# Altium PCB Mainboard PCB.pcbdoc (part 2 of 2)
Units mil, origin at the board's own origin, x right, y up, seen from the top; angles counter-clockwise.
Board outline 6050 x 5225 mil, 2 copper layers (Top Layer, Bottom Layer); 153 components, 224 nets, 656 pads, 330 vias.
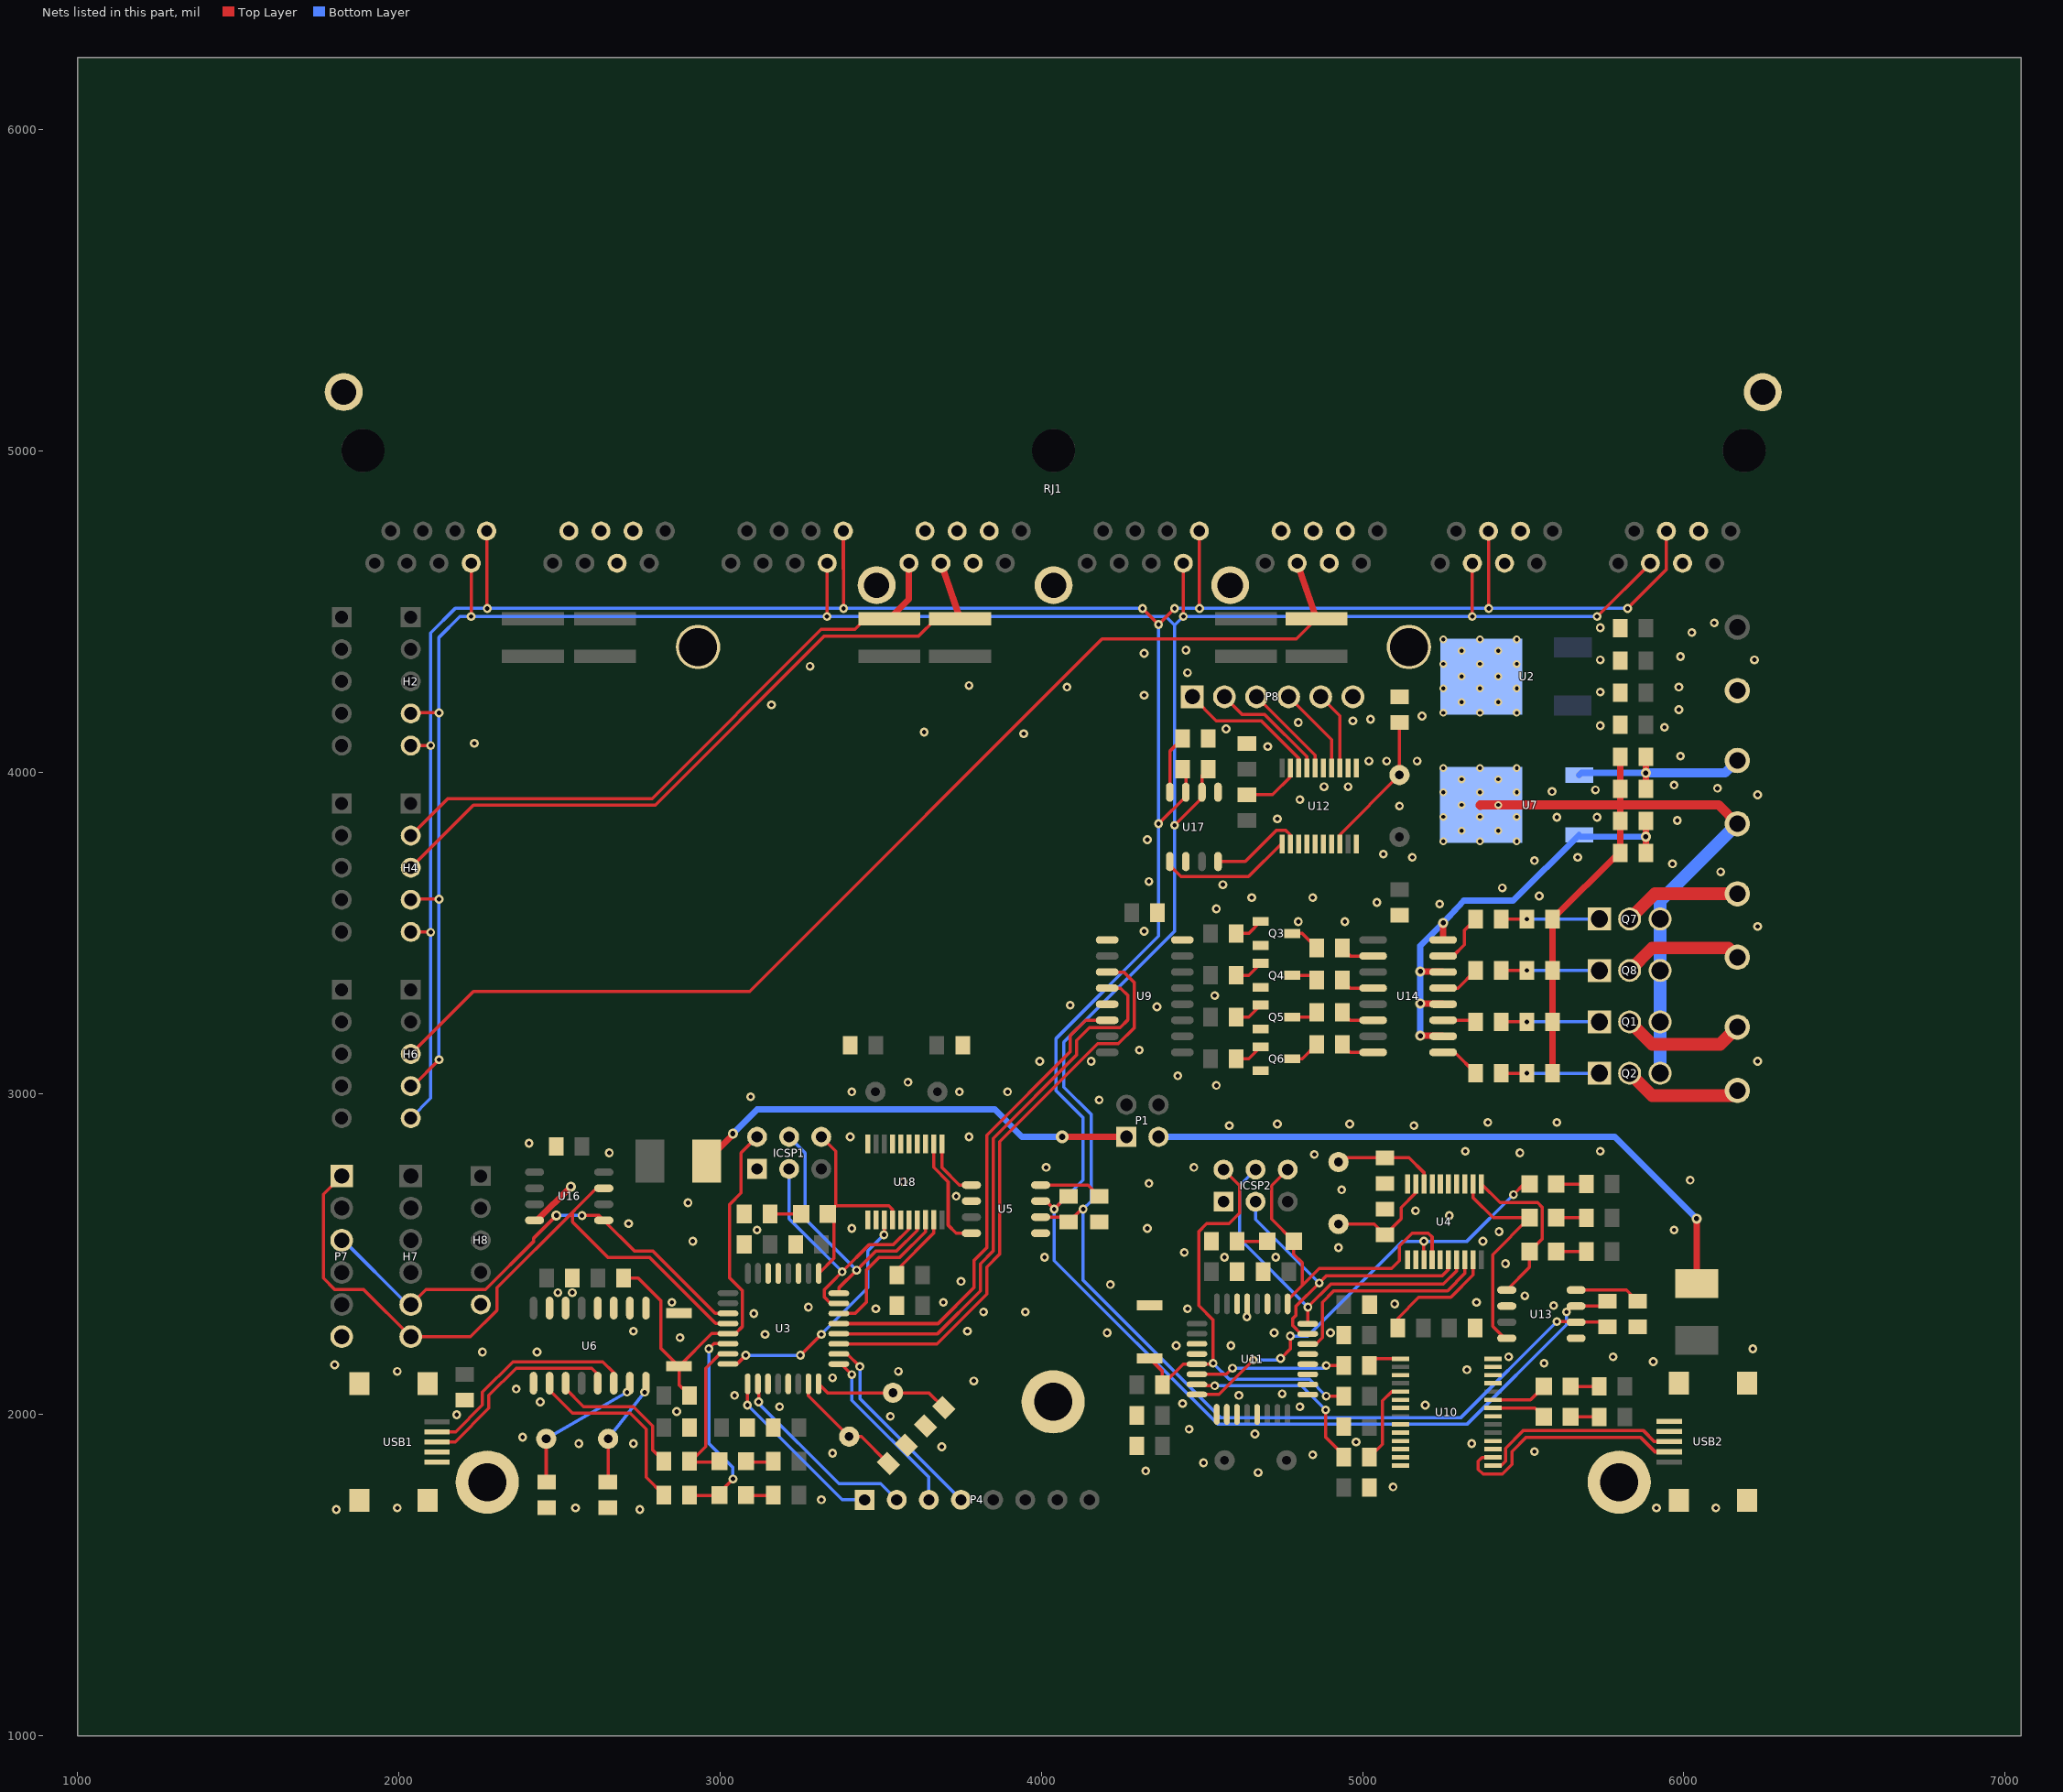
[diagram p2: the nets of this part, all layers, seen from the top]

## Via types
v1: diameter 27.56, hole 13.78, Top Layer to Bottom Layer, 259 vias
v2: diameter 24.41, hole 12, Top Layer to Bottom Layer, 36 vias
v3: diameter 31.5, hole 15.75, Top Layer to Bottom Layer, 24 vias
v4: diameter 39.37, hole 19.69, Top Layer to Bottom Layer, 5 vias
v5: diameter 35.43, hole 35.43, Top Layer to Bottom Layer, 4 vias
v6: diameter 47.24, hole 23.62, Top Layer to Bottom Layer, 2 vias

## Nets (pads, with @x,y where several pads share a name; then routed paths per layer and width w, separated by ;. In a path a pad name is that pad's centre, name@x,y a point inside that pad or via, vN(x,y) a via of type N, cw(c..) or ccw(c..) an arc to the next point about the centre after c; other vN are vias at no path point) (continued)
C36_1: C36.1 U12.8 X6.1 | length 455.3
  Top Layer w10: U12.8@4928.97,3776.86 4928.97,3805.42 X6.1@5115,3991.46 ; X6.1@5114.99,3991.41 C36.1@5115,4155
CANH: H2.5 H4.5 H6.5 R6.1 R19.1 R40.1 RJ1.8 RJ1.24 RJ1.40 RJ1.52 RJ1.60 U5.7 U13.7 U17.7 | length 11339.4
  Top Layer w10: H4.5@2036.99,3503.01 2097.81,3503.01 v1(2098.99,3501.82) ; H2.5@2036.99,4083.01 v1(2098.99,4083.45) ; RJ1.8@2273.3,4750.92 2273.29,4511.71 v1(2275.01,4509.99) ; RJ1.24@3383.59,4750.9 v1(3384.12,4509.99) ; U5.7@3997.87,2665 4015.01,2664.99 v1(4040.01,2639.99) 4079.99,2679.99 R6.1@4085,2680 ; v1(4315.01,4509.99) v1(4365.01,4459.99) v1(4415.01,4509.99) ; v1(4364.99,3840.01) 4449.99,3925.01 U17.7@4450,3937.87 ; R40.1@4440,4010 4450.01,3999.99 U17.7@4450,3937.87 ; RJ1.40@4492.19,4750.9 v1(4492.34,4509.99) ; RJ1.52@5391.99,4750.7 5391.99,4511.05 v1(5393.06,4509.99) ; v1(5635.01,2319.99) 5652.99,2338.01 U13.7@5664.87,2338.01 ; U13.7@5664.87,2338.01 5746.99,2338 R19.1@5761.99,2353.01 ; v1(5825.01,4509.99) 5946.3,4631.29 RJ1.60@5946.3,4750.7
  Bottom Layer w10: H6.5@2036.99,2923.01 2098.99,2985.01 v1(2098.99,3501.82) v1(2098.99,4083.45) 2098.99,4434.01 2174.98,4509.99 v1(2275.01,4509.99) v1(3384.12,4509.99) v1(4315.01,4509.99) ; v1(4365.01,4459.99) 4365.01,3890.01 4364.99,3490.01 4044.99,3170.01 4044.99,3010.01 4129.99,2925.01 4129.99,2729.99 v1(4040.01,2639.99) 4040,2480 4550,1970 5325,1970 5635,2280 v1(5635.01,2319.99) ; v1(4415.01,4509.99) v1(4492.34,4509.99) v1(5393.06,4509.99) v1(5825.01,4509.99)
CANL: H2.4 H4.4 H6.4 R6.2 R19.2 R40.2 RJ1.7 RJ1.23 RJ1.39 RJ1.51 RJ1.59 U5.6 U13.6 U17.6 | length 10716.2
  Top Layer w10: H6.4@2036.99,3023.01 2043.02,3023.01 v1(2125.01,3104.99) v1@2120,3110 ; H4.4@2036.99,3603.01 2038.98,3604.99 v1(2125.01,3604.99) ; H2.4@2036.99,4183.01 2038.98,4184.99 v1(2125.01,4184.99) ; RJ1.7@2224.89,4650.9 2224.89,4485.1 v1(2225.01,4484.99) ; v1(3332.62,4484.99) RJ1.23@3333.59,4650.9 ; U5.6@3997.87,2615 4070.01,2614.99 R6.2@4085,2600 4124.99,2640.01 v1(4130.01,2639.99) ; v1(4415.01,3834.99) 4500.01,3920.01 U17.6@4500,3937.87 4500.01,3990 R40.2@4520,4010 ; RJ1.39@4442.19,4650.9 v1(4442.34,4484.99) ; v1(5341.56,4484.99) RJ1.51@5341.99,4650.7 ; v1(5605.01,2289.99) 5662.87,2289.99 U13.6@5664.87,2288.01 5747,2288 R19.2@5761.99,2273.01 ; v1(5730.01,4484.99) 5730.59,4484.99 RJ1.59@5896.3,4650.7
  Bottom Layer w10: v1(2125.01,3104.99) v1(2125.01,3604.99) v1(2125.01,4184.99) 2125.01,4419.99 2190.01,4484.99 v1(2225.01,4484.99) v1(3332.62,4484.99) 4387.67,4484.99 ; 4387.69,4485.01 4414.99,4457.7 ; v1(5341.56,4484.99) v1(4442.34,4484.99) 4415,4457.66 4415,3890 4414.99,3505.01 4069.99,3160.01 4069.99,3020.01 4154.99,2935.01 4154.99,2665.01 v1(4130.01,2639.99) 4129.99,2418.85 4558.85,1990 5305,1990 v1(5605.01,2289.99) ; v1(5341.56,4484.99) v1(5730.01,4484.99)
CS1: U3.14 U18.18 | length 471.3
  Top Layer w10: U3.14@3369.49,2315.01 3419.99,2315.01 3454.99,2350.01 3454.99,2450.01 3494.99,2490.01 3559.99,2490.01 3638.99,2569.01 U18.18@3638.97,2607.05
CS2: U4.18 U11.14 | length 687.1
  Top Layer w10: U11.14@4829.49,2220.01 4854.99,2220.01 4874.99,2240.01 4874.99,2350.01 4909.99,2385.01 5264.99,2385.01 5318.99,2441.01 U4.18@5318.97,2482.05
CS3: P8.1 U12.18 | length 441.2
  Top Layer w10: P8.1@4470,4235 4544.99,4160 4685,4160 4801.03,4043.96 U12.18@4801.03,4012.95
D3/1: P4.1 U3.1 | length 553.7
  Top Layer w10: v1(3085.01,2029.99) 3085.01,2094.91 U3.1@3086.09,2096.01
  Bottom Layer w10: v1(3085.01,2029.99) 3380.01,1734.99 P4.1@3450,1735
D3/2: U11.1
D4/1: P4.2 U3.2 | length 616.3
  Top Layer w10: U3.2@3117.59,2096.01 3120.01,2093.6 v1(3120.01,2039.99)
  Bottom Layer w10: v1(3120.01,2039.99) 3119.99,2035.01 3369.99,1785.01 3499.99,1785.01 P4.2@3550,1735
D4/2: U11.2
D5/1: P4.3 U3.9 | length 543.4
  Top Layer w10: U3.9@3369.49,2157.61 3377.39,2157.61 v1(3410.01,2124.99)
  Bottom Layer w10: v1(3410.01,2124.99) 3409.99,2045.01 3649.99,1805.01 P4.3@3650,1735
D5/2: U11.9
D6/1: P4.4 U3.10 | length 627.2
  Top Layer w10: U3.10@3369.49,2189.11 3395.89,2189.11 v1(3435.01,2149.99)
  Bottom Layer w10: v1(3435.01,2149.99) 3434.99,2050.01 P4.4@3750,1735
D6/2: U11.10
D7/2: U11.11
D8/2: U11.12
D9/2: U11.13
DS: U3.13 U9.14 | length 1510.8
  Top Layer w10: U3.13@3369.49,2283.51 3678.49,2283.51 3789.99,2395.01 3789.99,2480.01 3829.99,2520.01 3829.99,2870.01 4089.99,3130.01 4089.99,3180.01 4137.99,3228.01 U9.14@4204.99,3228.01
E3: H4.2 R43.1 RJ1.25 | length 1967.7
  Top Layer w10: H4.2@2036.99,3803.01 2151.99,3918.01 2787.99,3918.01 3314.99,4445.01 3419.99,4445.01 3452.99,4478.01 R43.1@3526.99,4478.01
  Top Layer w19.68: R43.1@3526.99,4478.01 3587.89,4538.9 RJ1.25@3587.89,4650.9
E4: H4.3 R44.1 RJ1.27 | length 2213.7
  Top Layer w10: H4.3@2036.99,3703.01 2231.99,3898.01 2797.99,3898.01 3322.99,4423.01 3616.99,4423.01 3671.99,4478.01 R44.1@3746.99,4478.01
  Top Layer w19.68: RJ1.27@3687.89,4650.9 R44.1@3746.99,4478.01
E6: H6.3 R46.1 RJ1.43 | length 3564.4
  Top Layer w10: H6.3@2036.99,3123.01 2231.99,3318.01 3091.99,3318.01 4188.99,4415.01 4793.99,4415.01 R46.1@4856.99,4478.01
  Top Layer w19.68: RJ1.43@4796.49,4650.9 R46.1@4856.99,4478.01
F1_2: F1.2 P1.1 | length 1410.2
  Top Layer w19.68: F1.2@2958,2790 3040.01,2872 v3(3040.01,2874.99) ; v4(4065.01,2864.99) P1.1@4265,2865
  Bottom Layer w19.68: v3(3040.01,2874.99) 3114.99,2950.01 3854.99,2950.01 3939.99,2865.01 v4(4065.01,2864.99)
G+5V: C18.2 C19.2 U7.3 U14.10 U14.12 U14.14 U14.16 | length 1497.2
  Top Layer w19.68: v3(5180.01,3179.99) 5249,3180 U14.10@5250.99,3178.01 ; v3(5180.01,3279.99) 5249,3280 U14.12@5250.99,3278.01 ; v3(5180.01,3379.99) 5249,3380 U14.14@5250.99,3378.01 ; U14.16@5250.99,3478.01 v3(5250.99,3531.01) ; C19.2@5881.99,3748.75 v3(5881.99,3799.34) C18.2@5881.99,3848.75
  Bottom Layer w19.68: v3(5180.01,3179.99) 5180,3460.01 v3(5250.99,3531.01) 5315,3600 5469.4,3600.01 U7.3@5674.4,3805.01 5680.06,3799.34 v3(5881.99,3799.34)
G+12V: C16.2 C17.2 P3.1 U7.1 | length 611.3
  Top Layer w19.68: C16.2@5881.99,3948.75 v3(5881.99,3998.01) C17.2@5881.99,4048.75
  Bottom Layer w19.68: U7.1@5674.6,3991.01 5681.6,3998.01 v3(5881.99,3998.01)
  Bottom Layer w29.53: v3(5881.99,3998.01) 6008.4,3998.01 6128.4,3998.01 P3.1@6166.99,4036.61
GG: C16.1 C17.1 C18.1 C19.1 P3.2 Q1.3 Q2.3 Q7.3 Q8.3 R23.2 R24.2 R36.2 R37.2 U7.4 U8.2 | length 2775.7
  Top Layer w19.68: R24.2@5592.01,3062.99 R36.2@5592.01,3542.99 5797.76,3748.74 C19.1@5801.99,3748.75 C18.1@5801.99,3848.75 C16.1@5801.99,3948.75 C17.1@5801.99,4048.75
  Top Layer w29.53: U8.2@5367.1,3897.9 5801.99,3898.61 6107.8,3898.61 P3.2@6166.99,3839.41
  Bottom Layer w39.37: Q2.3@5926.49,3063.01 Q7.3@5926.49,3543.01 5926.49,3598.91 P3.2@6166.99,3839.41
  other v2: 5251.57,3785.09 5365.74,3785.09 5479.91,3785.09 5308.65,3818.11 5422.84,3818.11 5251.57,3861.18 5365.74,3861.18 5479.91,3861.18 5308.65,3898.11 5422.84,3898.11 5251.57,3937.32 5365.74,3937.32 5479.91,3937.32 5308.65,3978.11 5422.84,3978.11 5251.57,4013.43 5365.74,4013.43 5479.91,4013.43
GND: C1.2 C2.2 C3.2 C4.2 C5.1 C6.1 C7.1 C8.1 C9.1 C10.1 C11.2 C12.2 C13.1 C14.2 C20.1 C21.1 C22.2 C23.2 C24.2 C25.2 C26.2 C28.2 C29.1 C30.1 C31.2 C32.2 C33.2 C34.1 C35.2 C36.2 C37.2 C38.2 C39.2 H8.5 ICSP1.1 ICSP2.1 P2.2 P7.6 P8.6 pad.1 Q3.2 Q4.2 Q5.2 Q6.2 R7.1 R9.1 R17.2 R20.1 R22.1 R47.1 RJ1.0 RJ1.10 RJ1.12 RJ1.13 RJ1.14 RJ1.26 RJ1.28 RJ1.29 RJ1.30 RJ1.42 RJ1.44 RJ1.45 RJ1.46 RJ1.53 RJ1.54 RJ1.61 RJ1.62 SW1.1 SW2.1 U1.2 U2.2 U3.3 U3.5 U3.21 U4.10 U5.2 U6.1 U9.8 U9.13 U10.7 U10.18 U10.21 U10.25 U10.26 U11.3 U11.5 U11.21 U12.10 U13.2 U16.4 U17.2 U18.10 USB1.0 USB1.5 USB2.0 USB2.5 | length 228.8
  Top Layer w19.68: U16.4@2422.13,2605 2429.99,2605.01 v3(2534.99,2710.01)
  Bottom Layer w29.53: RJ1.0@3487.09,4582.4 RJ1.0@3487.09,4623.1 ; RJ1.0@4588.1,4582.4 RJ1.0@4588.1,4614.1
  other v1: 1805.01,1704.99 2750.01,1704.99 1995.01,1709.99 2550.01,1709.99 5915.01,1709.99 6100.01,1709.99 3315.01,1734.99 5095.01,1774.99 4675.01,1819.99 4325.01,1824.99 4505.01,1849.99 4845.01,1874.99 3350.01,1879.99 5535.01,1884.99 3690.01,1899.99 2560.01,1909.99 2730.01,1909.99 5340.01,1909.99 4980.01,1914.99 2385.01,1929.99 4665.01,1939.99 4460.01,1954.99 3530.01,1994.99 2180.01,1999.99 2865.01,2009.99 3185.01,2024.99 4805.01,2024.99 5195.01,2029.99 4440.01,2034.99 2440.01,2039.99 3045.01,2059.99 4615.01,2059.99 4750.01,2064.99 2365.01,2079.99 3790.01,2104.99 3350.01,2114.99 1995.01,2134.99 3555.01,2134.99 5325.01,2139.99 1800.01,2154.99 5565.01,2159.99 5905.01,2164.99 5455.01,2179.99 5780.01,2179.99 2260.01,2194.99 2430.01,2194.99 6215.01,2204.99 4420.01,2214.99 4590.01,2214.99 2875.01,2239.99 3140.01,2249.99 4205.01,2254.99 4725.01,2254.99 4900.01,2254.99 2730.01,2259.99 3770.01,2259.99 4640.01,2304.99 3105.01,2314.99 3820.01,2319.99 3950.01,2319.99 3485.01,2329.99 4455.01,2329.99 3275.01,2334.99 5595.01,2339.99 5100.01,2344.99 2850.01,2349.99 3695.01,2349.99 5355.01,2349.99 5505.01,2369.99 2495.01,2379.99 2540.01,2379.99 4215.01,2404.99 3750.01,2414.99 5445.01,2469.99 4010.01,2489.99 4570.01,2489.99 4730.01,2489.99 4445.01,2504.99 4925.01,2519.99 2915.01,2539.99 5375.01,2539.99 5425.01,2569.99 3115.01,2574.99 5970.01,2574.99 3410.01,2579.99 4330.01,2579.99 2715.01,2594.99 5270.01,2619.99 5165.01,2634.99 2900.01,2659.99 3735.01,2679.99 4935.01,2699.99 4335.01,2719.99 3570.01,2724.99 6020.01,2729.99 4015.01,2769.99 4475.01,2769.99 4850.01,2809.99 2655.01,2814.99 5490.01,2814.99 5320.01,2819.99 5740.01,2819.99 2405.01,2844.99 3405.01,2864.99 3775.01,2864.99 4585.01,2899.99 5160.01,2899.99 4735.01,2904.99 4960.01,2904.99 5390.01,2909.99 5605.01,2909.99 4180.01,2979.99 3095.01,2989.99 3410.01,3004.99 3745.01,3004.99 3895.01,3004.99 4545.01,3024.99 3585.01,3034.99 4425.01,3054.99 3995.01,3099.99 4155.01,3099.99 6230.01,3099.99 4305.01,3134.99 4360.01,3269.99 4090.01,3274.99 4540.01,3304.99 4320.01,3504.99 6230.01,3519.99 4800.01,3534.99 4945.01,3534.99 4545.01,3574.99 5240.01,3589.99 5045.01,3594.99 4655.01,3609.99 4845.01,3609.99 5550.01,3614.99 5435.01,3639.99 4565.01,3649.99 4335.01,3659.99 6115.01,3689.99 5965.01,3714.99 5535.01,3724.99 5155.01,3734.99 5670.01,3734.99 5065.01,3744.99 4330.01,3789.99 5980.01,3849.99 4735.01,3854.99 5605.01,3859.99 5730.01,3859.99 5115.01,3894.99 4805.01,3914.99 6230.01,3929.99 5590.01,3939.99 5725.01,3944.99 6105.01,3949.99 4880.01,3954.99 4955.01,3954.99 5970.01,3959.99 5020.01,4034.99 5075.01,4034.99 5170.01,4034.99 5990.01,4049.99 4705.01,4079.99 2235.01,4089.99 3945.01,4119.99 3635.01,4124.99 4575.01,4134.99 5940.01,4139.99 5740.01,4144.99 4800.01,4154.99 4970.01,4159.99 5025.01,4164.99 5185.01,4174.99 5985.01,4194.99 3160.01,4209.99 4320.01,4239.99 5740.01,4249.99 4080.01,4264.99 5985.01,4264.99 3775.01,4269.99 4455.01,4309.99 3280.01,4329.99 5740.01,4349.99 6220.01,4349.99 5990.01,4359.99 4320.01,4369.99 4450.01,4379.99 6025.01,4434.99 5740.01,4449.99 6095.01,4464.99
  other v2: 5251.57,4185.09 5365.74,4185.09 5479.91,4185.09 5308.65,4218.11 5422.84,4218.11 5251.57,4261.19 5365.74,4261.19 5479.91,4261.19 5308.65,4298.11 5422.84,4298.11 5251.57,4337.32 5365.74,4337.32 5479.91,4337.32 5308.65,4378.11 5422.84,4378.11 5251.57,4413.43 5365.74,4413.43 5479.91,4413.43
INT1: U3.32 U18.13 | length 766.7
  Top Layer w10: U3.32@3024.49,2158.01 3053.01,2158.01 v1(3080.01,2184.99) ; v1(3250.01,2184.99) v1(3315.01,2249.99) ; v1(3510.01,2559.99) 3511.02,2561.02 U18.13@3511.02,2606.84
  Bottom Layer w10: v1(3080.01,2184.99) v1(3250.01,2184.99) ; v1(3315.01,2249.99) 3459.99,2395.01 3459.99,2509.99 v1(3510.01,2559.99)
INT2: LED2.2 U4.13 U11.32 | length 1388.5
  Top Layer w10: U11.32@4484.49,2063.01 4553.02,2063.01 v1(4660.01,2169.99) ; v1(4745.01,2174.99) 4775,2204.99 v1(4775.01,2244.99) ; v1(5190.93,2539.99) U4.13@5191.02,2481.84 ; v1(5470.01,2684.99) 5503.06,2718.05 LED2.2@5519.99,2718.05
  Bottom Layer w10: v1(4660.01,2169.99) 4740,2169.99 v1(4745.01,2174.99) ; v1(4775.01,2244.99) 4830.01,2244.99 5125.01,2539.99 v1(5190.93,2539.99) 5325.01,2539.99 v1(5470.01,2684.99)
INT3: P8.5 U12.13 | length 246.3
  Top Layer w10: P8.5@4870,4235 4928.98,4176.01 U12.13@4928.98,4013.16
LED1_2: LED1.2 R7.2 | length 98
  Top Layer w10: R7.2@3155.01,2624.99 LED1.2@3253,2625.05
LED2_1: LED2.1 R3.1 | length 94.3
  Top Layer w10: LED2.1@5602.69,2718.01 R3.1@5696.99,2718.01
LED3_1: LED3.1 R4.1 | length 94.3
  Top Layer w10: LED3.1@5602.69,2613.01 R4.1@5696.99,2613.01
LED4_1: LED4.1 R5.1 | length 94.3
  Top Layer w10: LED4.1@5602.69,2508.01 R5.1@5696.99,2508.01
LED5_1: LED5.1 R8.1 | length 84.3
  Top Layer w10: LED5.1@3082.7,1853.01 R8.1@3166.99,1853.01
LED6_1: LED6.1 R10.1 | length 84.3
  Top Layer w10: LED6.1@3082.7,1748.01 R10.1@3166.99,1748.01
LED8_2: LED8.2 U10.23 | length 176.4
  Top Layer w10: U10.23@5405.99,2046.01 5522.94,2046 LED8.2@5564.99,2088.05
LED9_2: LED9.2 U10.22 | length 170.6
  Top Layer w10: U10.22@5405.99,2021.01 5537.06,2021 LED9.2@5564.99,1993.06
M8RX1: LED6.2 R11.2 U3.30 | length 662.5
  Top Layer w10: R11.2@2906.99,1748.01 LED6.2@2999.99,1748.01 ; v1(2965.01,2204.99) 2981.01,2221.01 U3.30@3024.49,2221.01 ; LED6.2@2998,1750.05 2998.01,1758.01 v1(3040.01,1799.99)
  Bottom Layer w10: v1(2965.01,2204.99) 2965,1910 3040,1835 v1(3040.01,1799.99)
M8RX2: R14.2 U11.31 | length 604
  Top Layer w10: U11.31@4484.49,2094.51 4489,2089.99 v1(4540.01,2089.99) ; v1(4885.01,2014.99) 4885.01,1929.99 4941.99,1873.01 R14.2@4941.98,1868.02
  Bottom Layer w10: v1(4540.01,2089.99) 4809.99,2090.01 v1(4885.01,2014.99)
M8TX1: LED5.2 R12.2 U3.31 | length 492.8
  Top Layer w10: LED5.2@2999.99,1853.01 2906.99,1853.01 2954.99,1901.01 2954.99,2145.01 2999.49,2189.51 U3.31@3024.49,2189.51
M8TX2: R13.2 U11.30 | length 468.7
  Top Layer w10: U11.30@4484.49,2126.01 4576.02,2126.01 v1(4595.01,2144.99) ; v1(4886.99,2153.01) R13.2@4941.98,2153.01
  Bottom Layer w10: v1(4595.01,2144.99) 4878.98,2144.99 v1(4886.99,2153.01)
NULL: 
OUT1-: R38.1 U14.15 | length 175
  Top Layer w10: U14.15@5250.99,3428.01 5281.99,3428.01 5316.99,3463.01 5316.99,3508.01 R38.1@5352.01,3542.99
OUT2-: R39.1 U14.13 | length 123.8
  Top Layer w10: U14.13@5250.99,3328.01 5297.02,3328.01 R39.1@5352.01,3382.99
OUT3-: R25.1 U14.11 | length 103.1
  Top Layer w10: U14.11@5250.99,3228.01 5346.99,3228.01 R25.1@5352.01,3222.99
OUT4-: R26.1 U14.9 | length 127.9
  Top Layer w10: U14.9@5250.99,3128.01 5286.99,3128.01 R26.1@5352.01,3062.99
P1_3: F2.2 P1.3 | length 1982.6
  Top Layer w19.68: F2.2@6040,2408 v3(6040.01,2609.99)
  Bottom Layer w19.68: P1.3@4365,2865 5785.01,2864.99 v3(6040.01,2609.99)
Q1_1: Q1.1 R23.1 R25.2 | length 305.5
  Top Layer w10: R25.2@5432.01,3222.99 v1(5512.01,3222.99)
  Bottom Layer w10: v1(5512.01,3222.99) Q1.1@5737.49,3223.01
Q2_1: Q2.1 R24.1 R26.2 | length 305.5
  Top Layer w10: R26.2@5432.01,3062.99 v1(5512.01,3062.99)
  Bottom Layer w10: v1(5512.01,3062.99) Q2.1@5737.49,3063.01
Q3_3: Q3.3 R27.2 | length 94.4
  Top Layer w10: Q3.3@4781.19,3498.01 4811.99,3498.01 R27.2@4856.98,3453.01
Q4_3: Q4.3 R28.2 | length 82
  Top Layer w10: Q4.3@4781.19,3368.01 4841.99,3368.01 R28.2@4856.98,3353.01
Q5_3: Q5.3 R29.2 | length 82
  Top Layer w10: Q5.3@4781.19,3238.01 4841.99,3238.01 R29.2@4856.98,3253.01
Q6_3: Q6.3 R30.2 | length 94.4
  Top Layer w10: Q6.3@4781.19,3108.01 4811.98,3108.01 R30.2@4856.98,3153.01
Q7/2: U9.9
Q7_1: Q7.1 R36.1 R38.2 | length 305.5
  Top Layer w10: R38.2@5432.01,3542.99 v1(5512.01,3542.99)
  Bottom Layer w10: v1(5512.01,3542.99) Q7.1@5737.49,3543.01
Q8_1: Q8.1 R37.1 R39.2 | length 305.5
  Top Layer w10: R39.2@5432.01,3382.99 v1(5512.01,3382.99)
  Bottom Layer w10: v1(5512.01,3382.99) Q8.1@5737.49,3383.01
R1_2: R1.2 U18.19 | length 219.5
  Top Layer w10: R1.2@3550,2435 3550.01,2450.01 3664.56,2564.56 U18.19@3664.56,2607.05
R13_1: R13.1 U10.1 | length 104.7
  Top Layer w10: R13.1@5021.98,2153.01 5042.98,2174.01 U10.1@5117.99,2174.01
R14_1: R14.1 U10.5 | length 259.6
  Top Layer w10: R14.1@5021.98,1868.02 5061.99,1908.02 5061.99,2043.01 5090.99,2072 U10.5@5117.99,2072.01
R15_1: R15.1 U4.19 | length 367.5
  Top Layer w10: R15.1@5110,2270 5109.99,2300.01 5174.99,2365.01 5274.99,2365.01 5344.6,2435.41 U4.19@5344.56,2482.05
R18_1: LED8.1 R18.1 | length 89.3
  Top Layer w10: LED8.1@5647.69,2088.05 R18.1@5737.01,2087.99
R20_2: LED7.2 R20.2 | length 93
  Top Layer w10: R20.2@4610.01,2539.99 4702.94,2539.99 LED7.2@4703.01,2540.05
R21_1: LED9.1 R21.1 | length 89.3
  Top Layer w10: LED9.1@5647.69,1993.06 R21.1@5737.01,1992.99
R22_2: R22.2 U13.8 | length 206.6
  Top Layer w10: U13.8@5664.87,2388.01 5822.01,2388 R22.2@5856.99,2353.01
R27_1: R27.1 U14.2 | length 106.4
  Top Layer w10: R27.1@4936.98,3453.01 4961.99,3428.01 U14.2@5032.99,3428.01
R28_1: R28.1 U14.4 | length 106.4
  Top Layer w10: R28.1@4936.98,3353.01 4961.99,3328.01 U14.4@5032.99,3328.01
R29_1: R29.1 U14.6 | length 106.4
  Top Layer w10: R29.1@4936.98,3253.01 4961.99,3228.01 U14.6@5032.99,3228.01
R30_1: R30.1 U14.8 | length 106.4
  Top Layer w10: R30.1@4936.98,3153.01 4961.99,3128.01 U14.8@5032.99,3128.01
R31_1: R31.1 U12.19 | length 185.9
  Top Layer w10: R31.1@4640,3930 4719.99,3930.01 4775.4,3985.41 U12.19@4775.44,4012.95
R32_2: Q3.1 R32.2 | length 91.3
  Top Layer w10: R32.2@4607.01,3497.99 4645.38,3497.99 Q3.1@4682.8,3535.41
R33_2: Q4.1 R33.2 | length 91.3
  Top Layer w10: R33.2@4607.01,3367.99 4645.38,3367.99 Q4.1@4682.8,3405.41
R34_2: Q5.1 R34.2 | length 91.3
  Top Layer w10: R34.2@4607.01,3237.99 4645.38,3237.99 Q5.1@4682.8,3275.41
R35_2: Q6.1 R35.2 | length 91.3
  Top Layer w10: R35.2@4607.01,3107.99 4645.38,3107.99 Q6.1@4682.8,3145.41
RESET1: C15.1 ICSP1.2 R2.1 SW1.2 U3.29 | length 1370.5
  Top Layer w10: C15.1@2699.99,2425.01 2744.99,2425.01 2814.99,2355.01 2814.99,2207.3 SW1.2@2871.99,2150.33 ; R2.1@2906.99,2058.01 2871.99,2093.01 SW1.2@2871.99,2150.33 2974.17,2252.51 U3.29@3024.49,2252.51 3047.49,2252.51 3069.99,2275.01 3069.99,2385.01 3029.99,2425.01 3029.99,2655.01 3064.99,2690.01 3064.99,2815.01 ICSP1.2@3115,2865
RESET2: C27.1 ICSP2.2 R16.1 SW2.2 U11.29 | length 1469.3
  Top Layer w10: SW2.2@4336.99,2175.33 4376.99,2135.32 R16.1@4376.98,2093.01 4441.48,2157.49 U11.29@4484.49,2157.51 4532.51,2157.5 v1(4535.01,2159.99) 4535.01,2294.99 4489.99,2340.01 4489.99,2570.01 4514.99,2595.01 4584,2595.01 4616.99,2628.01 4616.99,2713.01 ICSP2.2@4566.99,2763.01 ; v1(4886.99,2058.01) C27.1@4942.01,2057.99
  Bottom Layer w10: v1(4535.01,2159.99) 4585,2110 4835,2110 v1(4886.99,2058.01)
RX1: R11.1 U6.2 | length 600.9
  Top Layer w10: U6.2@2469,2098 2469,2076 2540,2005 2720,2005 2770,1955 2770,1805 R11.1@2825.01,1749.99
RXCAN1: U5.4 U18.2 | length 354.4
  Top Layer w10: U18.2@3664.56,2843.14 3664.59,2770.41 3709.99,2725.01 3709.99,2590.01 3734.99,2565.01 U5.4@3782.13,2565
RXCAN2: LED3.2 U4.2 U13.4 | length 689.1
  Top Layer w10: U4.2@5344.56,2718.14 5344.56,2675.44 5406.94,2613.05 LED3.2@5519.99,2613.05 5405,2498.06 5405,2275 5442.01,2237.99 U13.4@5449.12,2238.01
RXCAN3: U12.2 U17.4 | length 300
  Top Layer w10: U17.4@4550,3722.13 4634.99,3722.11 4732.9,3820.01 4759.99,3820.01 4775.4,3804.61 U12.2@4775.44,3776.86
S$18: 
S$20: 
SCK1: ICSP1.6 LED1.1 U3.17 U18.14 | length 729.3
  Top Layer w10: U3.17@3306.89,2440.01 3354.99,2488.11 3354.99,2605.7 LED1.1@3335.7,2625.05 ; ICSP1.6@3315,2865 3359.99,2820.01 3359.99,2649.3 LED1.1@3335.7,2625.05 ; U18.14@3536.61,2606.84 3536.59,2638.41 3524.99,2650.01 3360.7,2650.01 LED1.1@3335.7,2625.05
SCK2: ICSP2.6 LED7.1 U4.14 U11.17 | length 1071.7
  Top Layer w10: U11.17@4766.9,2345.01 4766.9,2356.91 4811.99,2402.01 ; ICSP2.6@4766.99,2763.01 4716.99,2713.01 4716.99,2608.76 LED7.1@4785.7,2540.05 ; LED7.1@4785.69,2540.11 4785.69,2499.3 4811.99,2473.01 4811.99,2402.01 ; U4.14@5216.61,2481.84 5216.6,2553.41 5204.99,2565.01 5154.99,2565.01 5114.99,2525.01 5114.99,2480.01 5089.99,2455.01 4864.99,2455.01 4811.99,2402.01
SCK3: P8.4 U12.14 | length 277.1
  Top Layer w10: P8.4@4770,4235 4903.4,4101.6 U12.14@4903.39,4013.16
SCL1: H7.6 P7.1 U3.28 U16.7 | length 2167.7
  Top Layer w10: P7.1@1821.99,2743.01 1764.99,2686.01 1764.99,2425.01 1799.99,2390.01 1889.99,2390.01 H7.6@2037.01,2242.99 2222.99,2243.01 2304.99,2325.01 2304.99,2395.01 2539.99,2630.01 ; U16.7@2637.87,2705 2614.99,2705.01 2554.99,2645.01 2540,2630 ; U3.28@3024.49,2283.91 2986.09,2283.91 2779.99,2490.01 2649.99,2490.01 2539.99,2600.01 2540,2630
SCL2: U11.28
SDA1: H7.5 P7.3 U3.27 U16.5 | length 1532.1
  Top Layer w10: H7.5@2037.01,2342.99 2083.99,2390.01 2269.99,2390.01 2419.99,2540.01 2419.99,2549.99 v3(2490.01,2619.99) ; v1(2570.01,2619.99) 2622.86,2619.99 U16.5@2637.87,2605 2732.86,2510 2790,2510 2984.59,2315.41 U3.27@3024.49,2315.41
  Bottom Layer w10: P7.3@1821.99,2543.01 1826.99,2543.01 2026.99,2343.01 H7.5@2037.01,2342.99 ; v3(2490.01,2619.99) v1(2570.01,2619.99)
SDA2: U11.27
SH/CP: U3.11 U9.11 | length 1821.7
  Top Layer w10: U3.11@3369.49,2220.61 3675.59,2220.61 3829.99,2375.01 3829.99,2460.01 3869.99,2500.01 3869.99,2850.01 4174.99,3155.01 4239.99,3155.01 4289.99,3205.01 4289.99,3345.01 4256.99,3378.01 U9.11@4204.99,3378.01
SI1: ICSP1.3 U3.15 U18.16 | length 835.1
  Top Layer w10: U3.15@3369.49,2346.51 3343.49,2346.51 3324.99,2365.01 3324.99,2390.01 3344.99,2410.01 v1(3380.01,2444.99) 3464.99,2530.01 3539.99,2530.01 3587.8,2577.8 U18.16@3587.79,2606.84
  Bottom Layer w10: ICSP1.3@3215,2765 3215.01,2609.99 v1(3380.01,2444.99)
SI2: ICSP2.3 U4.16 U11.15 | length 1009.8
  Top Layer w10: U11.15@4829.49,2251.51 4808.49,2251.51 4781.99,2278.01 4781.99,2298.01 4791.99,2308.01 4791.99,2336.99 v1(4865.01,2409.99) 4887.99,2433.01 5248.6,2433.01 5267.8,2452.2 U4.16@5267.79,2481.84
  Bottom Layer w10: ICSP2.3@4666.99,2663.01 4667,2608 v1(4865.01,2409.99)
SI3: P8.3 U12.16 | length 297.3
  Top Layer w10: P8.3@4670,4235 4852.22,4052.78 U12.16@4852.21,4013.16
SO1: ICSP1.4 U3.16 U18.17 | length 869.9
  Top Layer w10: U3.16@3369.49,2378.01 3369.49,2394.51 v1(3425.01,2449.99) 3484.99,2510.01 3549.99,2510.01 3613.39,2573.41 U18.17@3613.38,2606.84
  Bottom Layer w10: ICSP1.4@3215,2865 3264.99,2815.01 3264.99,2610.01 v1(3425.01,2449.99)
SO2: ICSP2.4 U4.17 U11.16 | length 1133
  Top Layer w10: U11.16@4829.49,2283.01 4829.49,2334.49 v1(4830.01,2334.99) 4901.59,2406.61 5251.61,2406.61 5293.38,2448.38 U4.17@5293.38,2481.84
  Bottom Layer w10: ICSP2.4@4666.99,2763.01 4616.99,2713 4616.99,2548.01 v1(4830.01,2334.99)
SO3: P8.2 U12.17 | length 369.1
  Top Layer w10: P8.2@4570,4235 4625,4180 4695,4180 4826.62,4048.37 U12.17@4826.62,4013.16
ST/CP: U3.12 U9.12 | length 1736.3
  Top Layer w10: U3.12@3369.49,2252.11 3677.09,2252.11 3809.99,2385.01 3809.99,2470.01 3849.99,2510.01 3849.99,2860.01 4109.99,3120.01 4109.99,3165.01 4149.99,3205.01 4244.99,3205.01 4269.99,3230.01 4269.99,3305.01 4246.99,3328.01 U9.12@4204.99,3328.01
TR1: P5.1 Q7.2 | length 368.1
  Top Layer w39.37: Q7.2@5831.49,3543.01 5910.1,3621.61 P5.1@6166.99,3621.61
TR2: P5.2 Q8.2 | length 376.3
  Top Layer w39.37: Q8.2@5831.49,3383.01 5901.49,3453.01 6138.4,3453.01 P5.2@6166.99,3424.41
TR3: P6.1 Q1.2 | length 386.7
  Top Layer w39.37: Q1.2@5831.49,3223.01 5901.49,3153.01 6113.4,3153.01 P6.1@6166.99,3206.61
TR4: P6.2 Q2.2 | length 371.3
  Top Layer w39.37: Q2.2@5831.49,3063.01 5901.49,2993.01 6150.6,2993.01 P6.2@6166.99,3009.41
TX1: R12.1 U6.3 | length 460.6
  Top Layer w10: U6.3@2519,2098 2519,2081 2575,2025 2730,2025 2790,1965 2790,1890 R12.1@2825.01,1854.99
TXCAN1: U5.1 U18.1 | length 188
  Top Layer w10: U18.1@3690.16,2843.16 3690.16,2769.84 3745,2715 U5.1@3782.13,2715
TXCAN2: LED4.2 U4.1 U13.1 | length 523.1
  Top Layer w10: U4.1@5370.16,2718.16 5428.31,2660 5545,2660 5560,2645 5560,2548.06 LED4.2@5519.99,2508.05 5519.99,2458.87 U13.1@5449.12,2388.01
TXCAN3: U12.1 U17.1 | length 418.6
  Top Layer w10: U17.1@4400,3722.13 4400.01,3709.99 4435,3675 4645,3675 4746.85,3776.84 U12.1@4749.84,3776.84
U3_7: C9.2 U3.7 X1.2 | length 372.9
  Top Layer w10: U3.7@3274.99,2096.01 3274.99,2058.59 X1.2@3401.79,1931.79 3440.06,1931.79 C9.2@3523.42,1848.43
U3_8: C10.2 U3.8 X1.1 | length 420.9
  Top Layer w10: U3.8@3306.49,2096.01 3334.29,2068.21 X1.1@3538.21,2068.21 3649.94,2068.21 C10.2@3696.58,2021.57
U3_19: U3.19
U3_22: U3.22
U4_3: U4.3
U4_4: U4.4
U4_5: U4.5
U4_6: U4.6
U4_7: U4.7
U4_11: U4.11
U4_12: U4.12
U4_15: U4.15
U5_5: U5.5
U5_8: R9.2 U5.8 | length 196.6
  Top Layer w10: U5.8@3997.87,2715 4145.01,2714.99 R9.2@4180,2680
U6_9: U6.9
U6_10: U6.10
U6_11: U6.11
U6_12: U6.12
U6_14: U6.14
U6_15: U6.15
U10_3: U10.3
U10_6: U10.6
U10_9: U10.9
U10_10: U10.10
U10_11: U10.11
U10_12: U10.12
U10_13: U10.13
U10_14: U10.14
U10_17: U10.17
U10_27: U10.27
U10_28: U10.28
U11_19: U11.19
U11_22: U11.22
U12_3: U12.3
U12_4: U12.4
U12_5: U12.5
U12_6: U12.6
U12_7: U12.7
U12_11: U12.11
U12_12: U12.12
U12_15: U12.15
U13_5: U13.5
U17_5: U17.5
U17_8: R47.2 U17.8 | length 183.7
  Top Layer w10: U17.8@4400,3937.87 4400.01,4065.01 R47.2@4440,4105
U18_3: U18.3
U18_4: U18.4
U18_5: U18.5
U18_6: U18.6
U18_7: U18.7
U18_11: U18.11
U18_12: U18.12
U18_15: U18.15
USB1_2: U6.6 USB1.2 | length 710.9
  Top Layer w10: USB1.2@2119.04,1946.59 2176.59,1946.6 2260,2030 2260,2070 2355,2165 2635,2165 2669,2131 U6.6@2669,2098
USB1_3: U6.5 USB1.3 | length 654.5
  Top Layer w10: USB1.3@2119.04,1915.09 2175.09,1915.11 2279.99,2020.01 2279.99,2060.01 2364.99,2145.01 2599.99,2145.01 2618.99,2126.01 U6.5@2619,2098
USB1_4: USB1.4
USB2_2: U10.16 USB2.2 | length 767.1
  Top Layer w10: U10.16@5405.99,1867.01 5371.99,1867.01 5359.99,1855.01 5359.99,1830.01 5374.99,1815.01 5434.99,1815.01 5464.99,1845.01 5464.99,1885.01 5509.99,1930.01 5864.99,1930.01 5910.6,1884.4 USB2.2@5954.95,1884.42
USB2_3: U10.15 USB2.3 | length 631.2
  Top Layer w10: U10.15@5405.99,1842.01 5432.01,1842.01 5445,1855 5445,1895 5500,1950 5875,1950 5909.09,1915.91 USB2.3@5954.95,1915.92
USB2_4: USB2.4
X3_1: C21.2 U6.8 X3.1 | length 349.4
  Top Layer w10: C21.2@2650.01,1790.01 2651.46,1791.47 X3.1@2651.46,1925 ; v1(2765.01,2069.99) 2769,2073.99 U6.8@2769,2098
  Bottom Layer w10: X3.1@2651.46,1925 v1(2765.01,2069.99)
X3_2: C20.2 U6.7 X3.2 | length 457.6
  Top Layer w10: X3.2@2458.54,1925 2458.54,1791.47 C20.2@2460.01,1790.01 ; v1(2710.01,2069.99) 2719,2078.99 U6.7@2719,2098
  Bottom Layer w10: X3.2@2458.54,1925 v1(2710.01,2069.99)
X5_1: C32.1 U4.8 X5.1 | length 326.5
  Top Layer w10: X5.1@4925,2786.46 4938.55,2800 C32.1@5070,2800 5145,2800 5191.03,2753.97 U4.8@5191.03,2718.14
X5_2: C31.1 U4.9 X5.2 | length 356.6
  Top Layer w10: X5.2@4925,2593.54 5036.46,2593.54 C31.1@5070,2560 5120,2610 5120,2645 5165.44,2690.44 U4.9@5165.44,2718.14
pads on no net: RJ1. U10.8 U10.24
copper on no net:
  other v5: 1979.37,1828.48 6094.64,1829.31 1979.37,2001.7 6094.64,2002.53

## Polygon pours and split planes (outlines as drawn)
GND on Bottom Layer (solid): 6415,5600 6480,1500 1525,1545 1635,5725
GND on Top Layer (solid): 6550,5610 6530,1575 1500,1515 1515,5675

## Silkscreen, mask and mechanical layers (free items; w line width, h text height)
Top Overlay:
  text "JLCJLCJLCJLC" at 3625.01,5179.99 h80

## Text inside footprints (layer, text, board x,y; h text height)
R41: Document "REF" at 2535.1,4466.98 h39.37 r270
R42: Document "REF" at 2760.1,4466.98 h39.37 r270
R43: Document "REF" at 3645.1,4466.98 h39.37 r270
R44: Document "REF" at 3865.1,4466.98 h39.37 r270
R45: Document "REF" at 4755.1,4466.98 h39.37 r270
R46: Document "REF" at 4975.1,4466.98 h39.37 r270